# Altium PCB STM32_IMU_DataLogger.PcbDoc
Units mil, origin at the board's own origin, x right, y up, seen from the top; angles counter-clockwise.
Board outline 1675 x 1665 mil, 4 copper layers (Top Layer, Layer 2, Layer 3, Bottom Layer), stack 62.63 mil thick; 44 components, 34 nets, 195 pads, 66 vias.
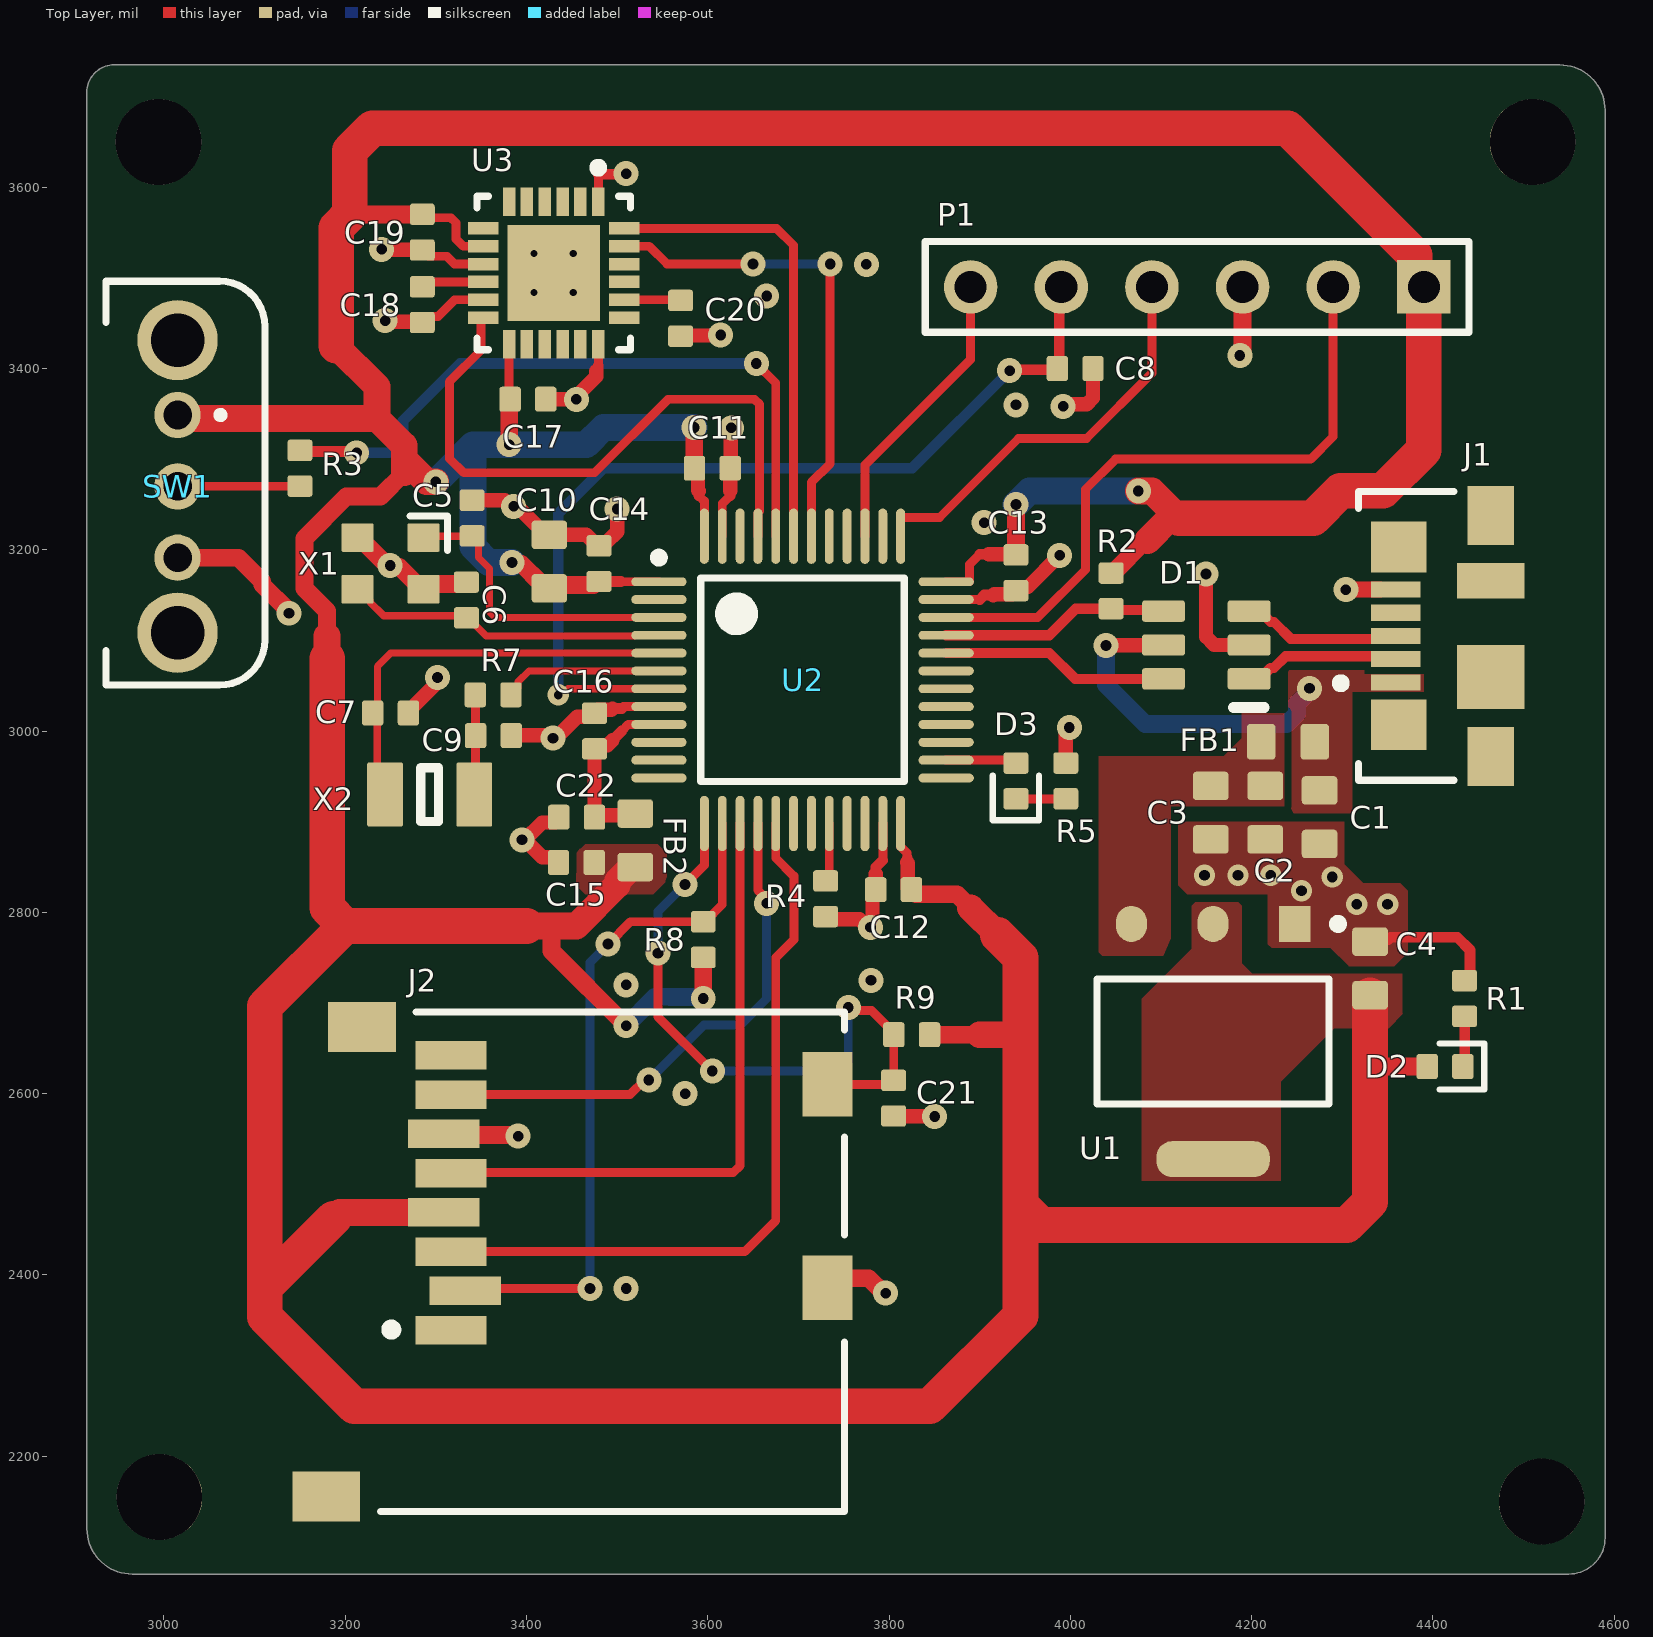
[diagram p0: Top Layer view]
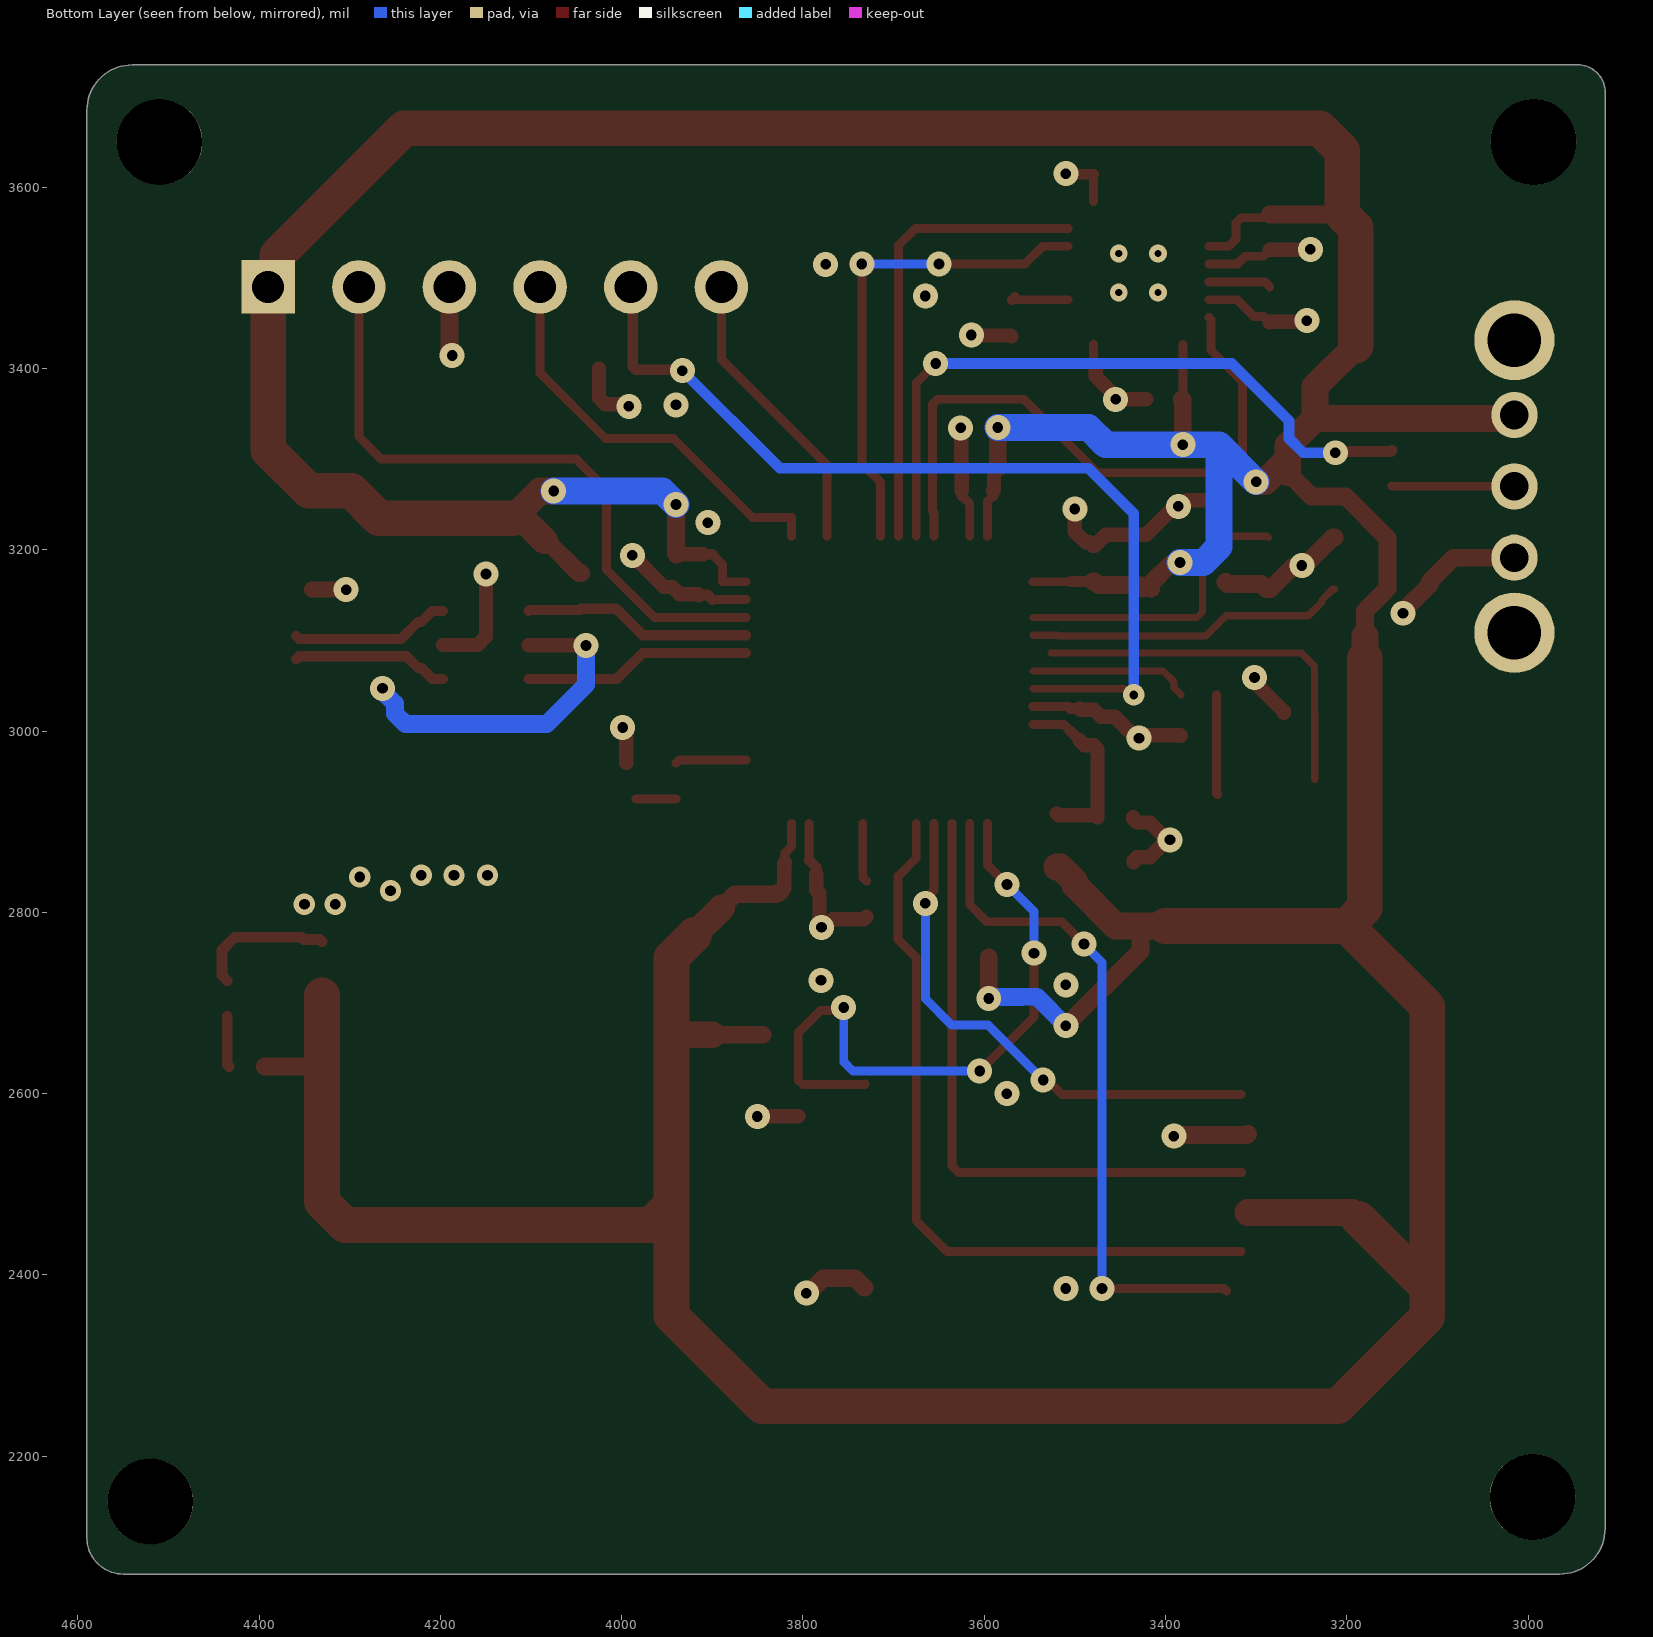
[diagram p1: Bottom Layer view, seen from below]
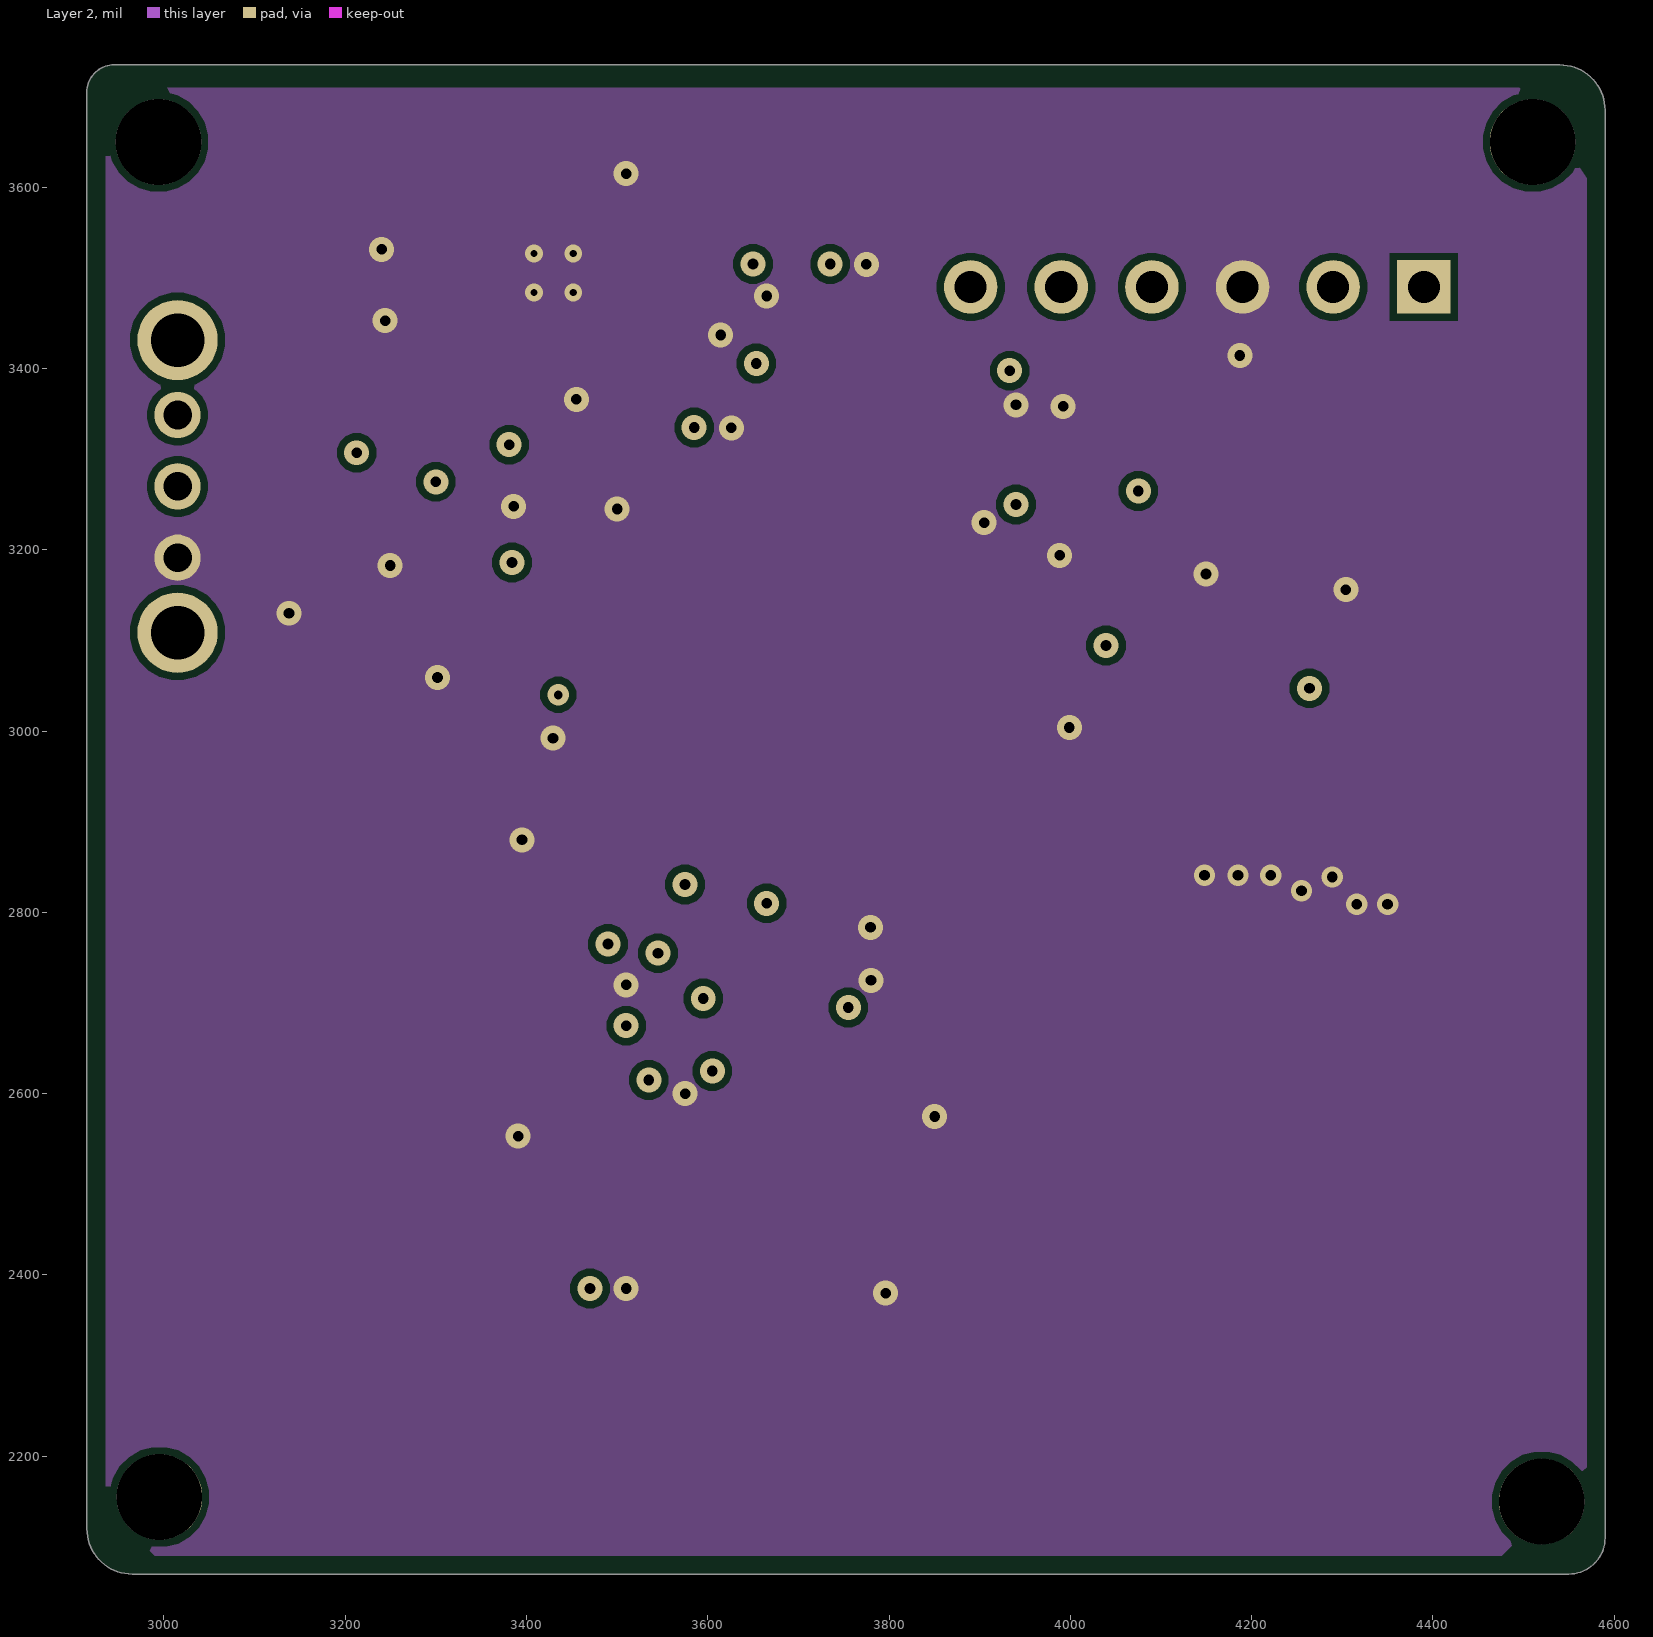
[diagram p2: Layer 2]
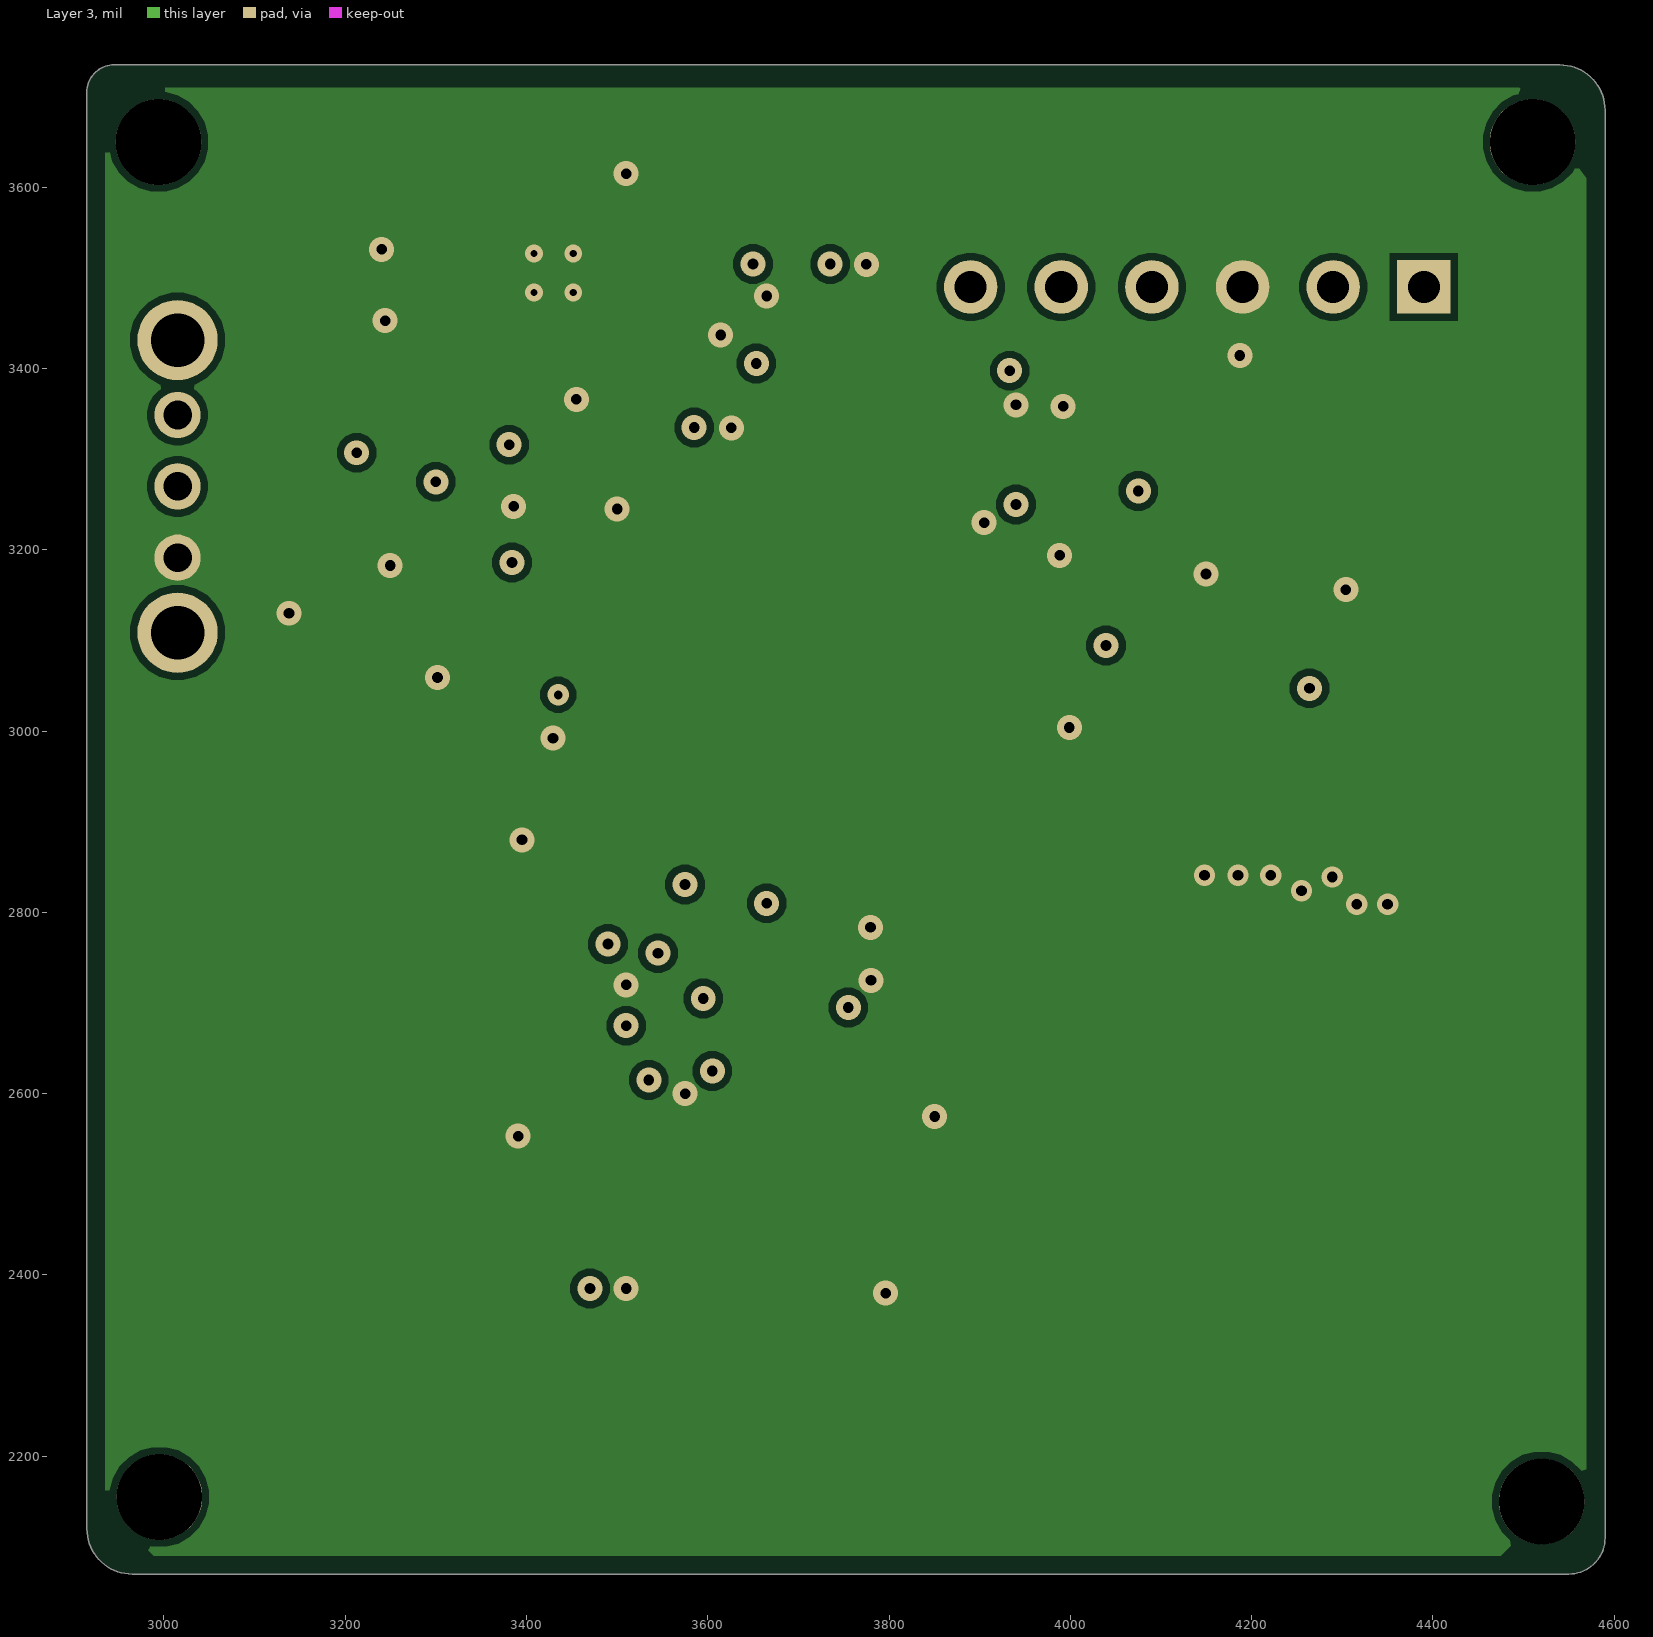
[diagram p3: Layer 3]
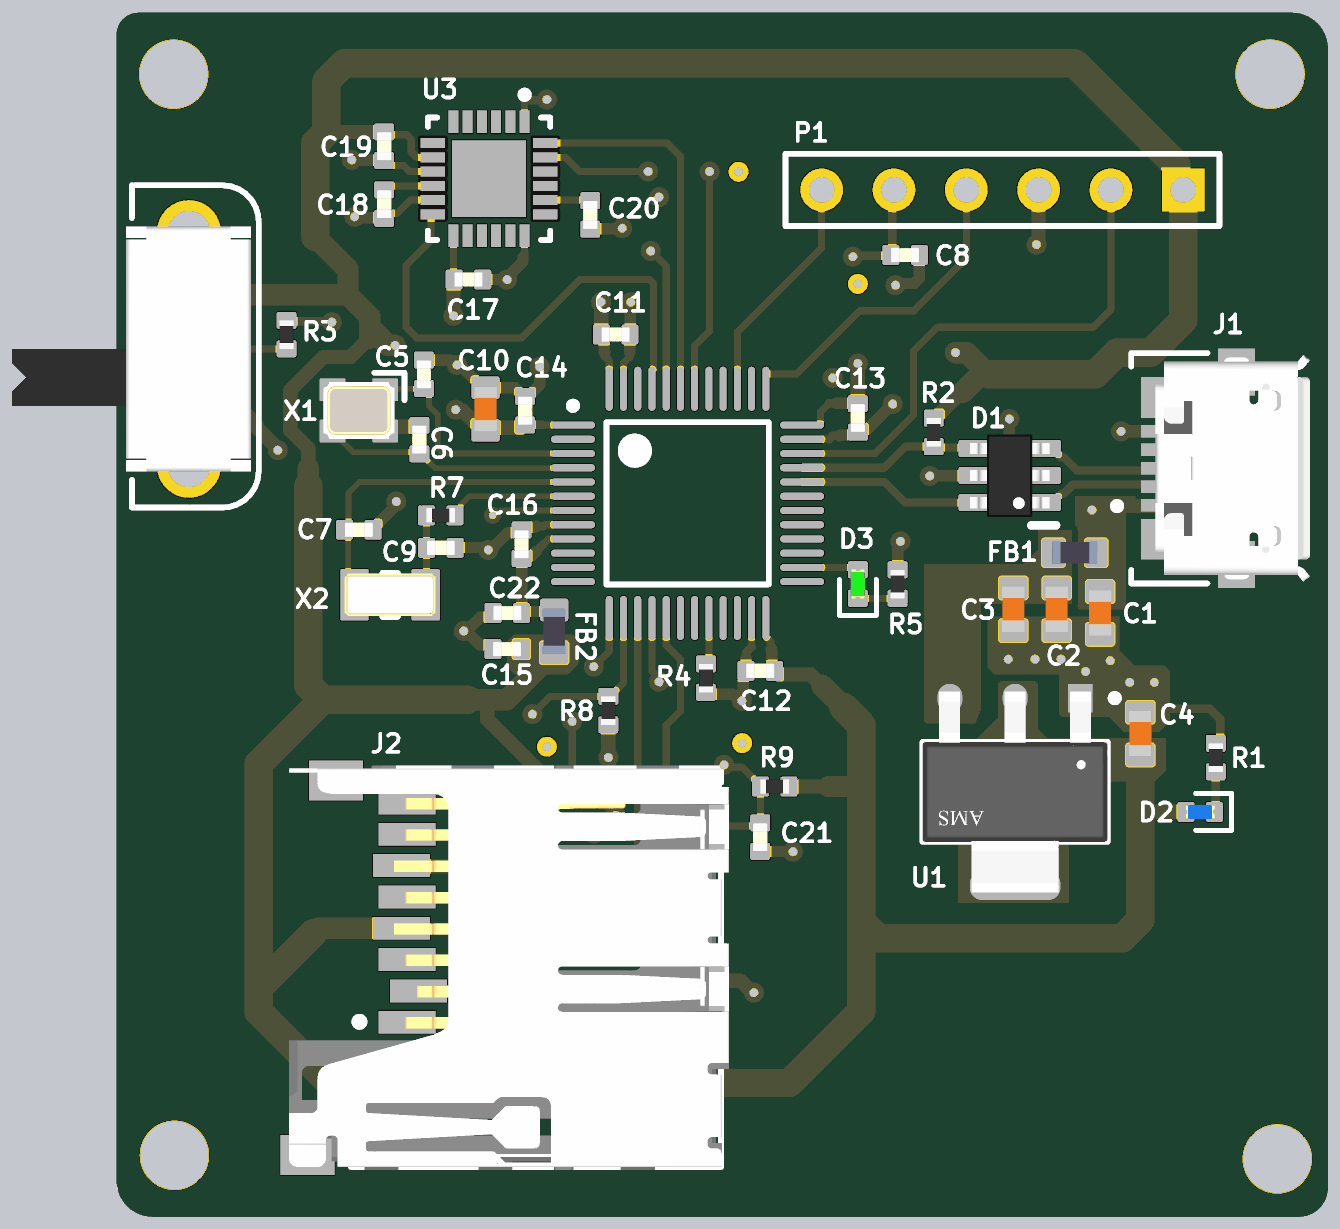
[diagram p4: 3D render of the assembled board from above, using the file's embedded part models]

## Layer stack, top to bottom
Top Solder: solder mask 1, SM-001, Dk 3.8
Top Layer: signal copper 1.378
Dielectric 1: prepreg 8.2835, PP-017, Dk 4.4
Layer 2: signal copper 0.689
Dielectric 3: core 41.9291, Core-039, Dk 4.6
Layer 3: signal copper 0.689
Dielectric 5: prepreg 8.2835, PP-017, Dk 4.4
Bottom Layer: signal copper 1.378
Bottom Solder: solder mask 1, SM-001, Dk 3.8

## Board outline
2915,2120 2915,3705 cw(c2945,3705) 2945,3735 4540,3735 cw(c4540,3685) 4590,3685 4590,2110 cw(c4550,2110) 4550,2070 2965,2070 cw(c2965,2120)

## Design rules (kind name [scope] priority, off if disabled: settings)
Clearance [All] p1: gap=7.87 ignorepadtopadclearanceinfootprint=TRUE
DiffPairsRouting [All] p1: maxlimit=10 minlimit=8 mostfreqgap=10 toplayer_maxgap=8 toplayer_prefgap=8 toplayer_minwidth=11.19 toplayer_maxwidth=11.19 toplayer_prefwidth=11.19 bottomlayer_maxgap=8 bottomlayer_prefgap=8 bottomlayer_minwidth=11.19 bottomlayer_maxwidth=11.19 bottomlayer_prefwidth=11.19 impedanceprofiledriven=TRUE impedanceprofileid={A912763B-8F11-4AA3-97E2-962D160E3E6F} impedanceprofilevalue=90.000000 maxuncoupledlength=500
MinimumSolderMaskSliver [All] p1: minsoldermaskwidth=3.94
PolygonConnect [All] p1: connectstyle=Direct reliefconductorwidth=10 reliefentries=4 polygonreliefangle="90 Angle" airgapwidth=10
RoutingVias [All] p1: holewidth=11.81 width=27.56 viastyle="Through Hole" minholewidth=9.84 minwidth=21.65 maxholewidth=15.75 maxwidth=35.43
SilkToSolderMaskClearance [IsPad] p1: minsilkscreentomaskgap=5.91 clearancetoexposedcopper=TRUE
SolderMaskExpansion [All] p1: expansion=1.5 istentingtop=FALSE
Width [All] p1: maxlimit=39.37 minlimit=7.87 preferedwidth=10 midlayer1_minwidth=10 midlayer1_maxwidth=10 midlayer2_minwidth=10 midlayer2_maxwidth=10 minimp=50.000000 maximp=50.000000 favimp=50.000000
27 further rules are at their usual default settings.

## Classes and differential pairs
differential pair USB_D: +USB_D_P -USB_D_N
differential pair USB_CONN_D: +USB_CONN_D_P -USB_CONN_D_N

## Components (designator, comment, footprint, x,y, rotation, side; value= is the part's Value field where it differs from the comment)
C1 "10n" CAP_0603 4275,2905 r90 top
C2 "100n" CAP_0603 4215,2910 r90 top
C3 "10u" CAP_0603 4155,2910 r90 top
C4 "22u" CAP_0603 4330.71,2738.19 r270 top
C5 "7p" CAP_0402 3340,3235 r270 top
C6 "7p" CAP_0402 3333.66,3144.68 r270 top
C7 "20p" CAP_0402 3250,3020 r180 top
C8 "100n" CAP_0402 4005.32,3400 r180 top
C9 "20p" CAP_0402 3363.5,2995 r180 top
C10 "4u7" CAP_0603 3425.2,3187.01 r270 top
C11 "10n" CAP_0402 3605,3290 r180 top
C12 "100n" CAP_0402 3805,2825 r0 top
C13 "100n" CAP_0402 3940,3174.68 r90 top
C14 "100n" CAP_0402 3480,3184.69 r270 top
C15 "1u" CAP_0402 3455,2855 r0 top
C16 "10n" CAP_0402 3475,3000 r270 top
C17 "100n" CAP_0402 3401.57,3366.14 r180 top
C18 "100n" CAP_0402 3285,3470.43 r90 top
C19 "10n" CAP_0402 3285,3550.43 r90 top
C20 "2n2" CAP_0402 3570,3455.43 r90 top
C21 "100n" CAP_0402 3805,2595 r90 top
C22 "1u" CAP_0402 3455.31,2905 r0 top
D1 "USBLC6-2SC6" SOT-23-6 4150,3095 r90 top
D2 "BLUE" LED_0402_BLUE 4413.39,2629.92 r0 top
D3 "GREEN" LED_0402_GREEN 3940,2945 r270 top
FB1 "120R" FB_0603 4240.16,2988.19 r180 top
FB2 "120R" FB_0603 3520,2879.53 r90 top
J1 "Micro-B USB Connector" FP-473460001-MFG 4450,3105 r90 top
J2 "MEM2061-01-188-00-A" MEM2061-01-188-00-A 3455.55,2414.45 r270 top
P1 "Header 6" HDR1X6 4390,3490 r180 top
R1 "1K" RES_0402 4435,2705 r90 top
R2 "1K5" RES_0402 4045,3154.69 r270 top
R3 "10K" RES_0402 3150,3290 r90 top
R4 "10K" RES_0402 3730,2815 r90 top
R5 "1K" RES_0402 3995,2945 r270 top
R7 "0R" RES_0402 3363.19,3040 r0 top
R8 "4K7" RES_0402 3595,2770 r270 top
R9 "4K7" RES_0402 3825,2665 r0 top
SW1 "OS102011MA1QN1" OS102011MA1QN1 3015,3270 r270 top
U1 "AMS1117-3.3" FP-AMS1117-IPC_C 4157.48,2657.48 r270 top
U2 "STM32F103C8T6" STM-LQFP48_L 3704.53,3056.54 r0 top
U3 "MPU-6050" IS-QFN-24_V 3430,3505.43 r270 top
X1 "32.768K" XTAL_2520 3250,3185 r180 top
X2 "8MHz" XTAL_3215-2 3293.19,2930 r0 top

## Footprints (in the part's own frame and the unit in brackets; to place one, negate y for a bottom-side part, rotate by r counter-clockwise, add the part's x,y. Pads: shape width x height; smd on the part's side, far side on the other; paste and mask are expansions set on the pad)
CAP_0402 [mm]
  rrect25% 0.6x0.7 smd: 1(-0.5,0) 2(0.5,0)
  body extent -0.5,-0.26 0.5,0.27, height 0.37
CAP_0603 [mm]
  rrect25% 0.8x1 smd: 1(-0.75,0) 2(0.75,0)
  body extent -0.8,-0.4 0.8,0.4, height 0.51
FB_0603 [mm]
  rrect25% 0.8x1 smd: 1(-0.75,0) 2(0.75,0)
  body extent -0.8,-0.4 0.8,0.4, height 0.81
FP-473460001-MFG [mm]
  rect 0.45x1.38 smd paste+0 mask+0: 1(-1.3,2.31) 2(-0.65,2.31) 3(0,2.31) 4(0.65,2.31) 5(1.3,2.31)
  rect 1.425x1.55 smd paste+0 mask+0: 6(-2.488,2.225) 7(2.488,2.225)
  rect 1.65x1.3 smd paste+0 mask+0: 8(-3.375,-0.35) 11(3.375,-0.35)
  rect 1.8x1.9 smd paste+0 mask+0: 9(-1.15,-0.35)
  rect 1x1.9 smd paste+0 mask+0: 10(1.55,-0.35)
  silkscreen extent -4.05,0.67 4.05,3.97, body extent -4.3,-2.48 4.3,3.45, height 0.25
FP-AMS1117-IPC_C [mm]
  rect 1.004x0.872 smd paste+0 mask+0: 1(-3.295,2.29)
  rrect100% 1.004x0.872 smd paste+0 mask+0: 2(-3.295,0) 3(-3.295,-2.29)
  rrect87% 1.004x3.182 smd paste+0 mask+0: 4(3.295,0)
  silkscreen extent -3.42,-3.25 1.75,3.63, body extent -3.9,-3.35 3.9,3.35, height 0.25
HDR1X6 [mm] "Connector; Header; 6 Position"
  rect 1.5x1.5 hole 0.9: 1(0,0)
  round 1.5 hole 0.9: 2(2.54,0) 3(5.08,0) 4(7.62,0) 5(10.16,0) 6(12.7,0)
  silkscreen extent -1.27,-1.27 13.97,1.27
IS-QFN-24_V [mm] "QFN, 24-Leads, Body 4x4mm, Pitch 0.5mm, Thermal Pad 2.7x2.6mm"
  rect 0.8x0.35 smd: 1(-2,1.25) 2(-2,0.75) 3(-2,0.25) 4(-2,-0.25) 5(-2,-0.75) 6(-2,-1.25) 13(2,-1.25) 14(2,-0.75) 15(2,-0.25) 16(2,0.25) 17(2,0.75) 18(2,1.25)
  rect 0.35x0.85 smd mask+0.102: 7(-1.25,-1.975) 8(-0.75,-1.975) 9(-0.25,-1.975) 10(0.25,-1.975) 11(0.75,-1.975) 12(1.25,-1.975) 19(1.25,1.975) 20(0.75,1.975) 21(0.25,1.975) 22(-0.25,1.975) 23(-0.75,1.975) 24(-1.25,1.975)
  rect 2.7x2.6 smd: 25(0,0)
  silkscreen extent -3.07,-2.15 2.15,2.15, body extent -2,-2 2,2, height 0.95
LED_0402_BLUE [mm]
  rrect25% 0.6x0.7 smd: A(-0.5,0) K(0.5,0)
  silkscreen extent -0.15,-0.65 1.1,0.65, body extent -0.51,-0.25 0.51,0.25, height 0.45
LED_0402_GREEN [mm]
  rrect25% 0.6x0.7 smd: A(-0.5,0) K(0.5,0)
  silkscreen extent -0.15,-0.65 1.1,0.65, body extent -0.51,-0.25 0.51,0.25, height 0.45
MEM2061-01-188-00-A [mm]
  rect 0.8x2 smd: 1(1.915,-3.525) 2(0.815,-3.125) 3(-0.285,-3.525) 4(-1.385,-3.725) 5(-2.485,-3.525) 6(-3.585,-3.725) 7(-4.685,-3.525) 8(-5.785,-3.525)
  rect 1.8x1.4 smd: CD1(0.725,7.025) CD2(-4.975,7.025)
  rect 1.4x1.9 smd: SH(-6.575,-6.025) SH(6.575,-7.025)
  silkscreen extent -7,-5.5 7,7.5, body extent -7.1,-7.67 7.1,7.78, height 1.94
OS102011MA1QN1 [mm]
  round 1.3 hole 0.8: 1(-2,0) 2(0,0) 3(2,0)
  round 2.25 hole 1.5: MH(-4.1,0) MH(4.1,0)
  silkscreen extent -5.75,-2 5.57,2.45, body extent -4.3,-6.22 4.3,2.18, height 4.59
RES_0402 [mm]
  rrect25% 0.6x0.7 smd: 1(-0.5,0) 2(0.5,0)
  body extent -0.5,-0.25 0.5,0.25, height 0.3
SOT-23-6 [mm]
  rrect25% 0.6x1.2 smd: 1(-0.95,-1.2) 2(0,-1.2) 3(0.95,-1.2) 4(0.95,1.2) 5(0,1.2) 6(-0.95,1.2)
  silkscreen extent -1.75,-1.63 -1.75,-0.76, body extent -1.45,-1.4 1.45,1.4, height 1.45
STM-LQFP48_L [mm] "QFP, 48-Leads, Body 7x7mm, Pitch 0.5mm, IPC High Density"
  oval 1.55x0.25 smd: 1(-4.025,2.75) 2(-4.025,2.25) 3(-4.025,1.75) 4(-4.025,1.25) 5(-4.025,0.75) 6(-4.025,0.25) 7(-4.025,-0.25) 8(-4.025,-0.75) 9(-4.025,-1.25) 10(-4.025,-1.75) 11(-4.025,-2.25) 12(-4.025,-2.75) 25(4.025,-2.75) 26(4.025,-2.25) 27(4.025,-1.75) 28(4.025,-1.25) 29(4.025,-0.75) 30(4.025,-0.25) 31(4.025,0.25) 32(4.025,0.75) 33(4.025,1.25) 34(4.025,1.75) 35(4.025,2.25) 36(4.025,2.75)
  oval 0.25x1.55 smd: 13(-2.75,-4.025) 14(-2.25,-4.025) 15(-1.75,-4.025) 16(-1.25,-4.025) 17(-0.75,-4.025) 18(-0.25,-4.025) 19(0.25,-4.025) 20(0.75,-4.025) 21(1.25,-4.025) 22(1.75,-4.025) 23(2.25,-4.025) 24(2.75,-4.025) 37(2.75,4.025) 38(2.25,4.025) 39(1.75,4.025) 40(1.25,4.025) 41(0.75,4.025) 42(0.25,4.025) 43(-0.25,4.025) 44(-0.75,4.025) 45(-1.25,4.025) 46(-1.75,4.025) 47(-2.25,4.025) 48(-2.75,4.025)
  silkscreen extent -4.15,-2.85 2.85,3.55, body extent -3.5,-3.5 3.5,3.5, height 1.6
XTAL_2520 [mm]
  rrect10% 0.9x0.8 smd mask+0: 1(-0.925,-0.725) 2(0.925,-0.725) 3(0.925,0.725) 4(-0.925,0.725)
  silkscreen extent -1.6,-1.33 -0.54,-0.36, body extent -1.25,-1 1.25,1, height 0.8
XTAL_3215-2 [mm]
  rrect10% 1x1.8 smd: 1(-1.25,0) 2(1.25,0)
  silkscreen extent -0.25,-0.75 0.25,0.75, body extent -1.6,-0.75 1.6,0.75, height 0.91

## Part data
C1 C2 C3 C4 C10: library part CAP_0603, "Capacitor SMD 0603"
C5 C6 C7 C8 C9 C11 C12 C13 C14 C15 C16 C17 C18 C19 C20 C21 C22: library part CAP_0402, "Capacitor SMD 0402"
D1: "Low-Capacitance ESD Protection USB", Manufacturer=STMicroelectronics, Distributor Link=https://www.mouser.de/ProductDetail/STMicroelectronics/USBLC6-2SC6?qs=po45yt2pPpu%2FhNIlwQdTlg%3D%3D, Manufacturer Part Number=USBLC6-2SC6
D2: library part LED_0402_BLUE, "LED 0402 BLUE SMD"
D3: library part LED_0402_GREEN, "LED 0402 GREEN SMD"
FB1 FB2: library part FB_0603, "Ferrite Bead SMD 0603"
J1: library part CMP-2000-05246-2, "CONN RCPT USB2.0 MICRO B SMD R/A", Current Rating=1.8A, Manufacturer=Molex, Manufacturer Part Number=473460001, Package=0, Temperature="-30°C to +85°C", Temperature Range High=+85°C, Temperature Range Low=-30°C, Voltage Rating=30V, Automotive=No, Category=Conn, ComponentLink2Description=Datasheet, ComponentLink2URL=https://www.molex.com/webdocs/datasheets/pdf/en-us/0473460001_IO_CONNECTORS.pdf, Conn Orientation="Right Angle", Contact Material=Gold,Nickel, Device Class L1=Connectors, Device Class L2="USB Connectors", Device Class L3=unset, Digikey Description="CONN RCPT USB2.0 MICRO B SMD R/A", Footprint Url=https://www.molex.com/pdm_docs/sd/473460001_sd.pdf, Height=2.945mm, Is Female=yes, Lead Free=Yes, Number Of Contacts=5, Octopart=https://octopart.com/47346-0001-molex-7164928, Pitch=0.65mm, RoHS=TRUE, Shielding=true, Usb Standard="USB 2.0"
J2: "Micro SD Card Holder Push-Push SMD", Manufacturer=GCT, Manufacturer Part Number=MEM2061-01-188-00-A
P1: "Header, 6-Pin", LatestRevisionDate=17-Jul-2002, LatestRevisionNote="Re-released for DXP Platform.", Publisher="Altium Limited"
R1 R2 R3 R4 R5 R7 R8 R9: library part RES_0402, "Resistor SMD 0402"
SW1: "Slide Switch SPDT Horizontal THT", Manufacturer=C&K, Manufacturer Part Number=OS102011MA1QN1
U1: library part CMP-209535-000001-1, "LDO Voltage Regulators 1A, 3.3V", Dropout Voltage=1.1V, Manufacturer="Advanced Monolithic Systems", Max Junction Temp=+125°C, Max Power Dissipation=1.2W, Max Supply Voltage=15V, Nominal Supply Current=5mA, Output Current=1A, Output Voltage=3.3V, Package=AMS1117, Temperature="-40°C to +125°C", Temperature Range Low=-40°C, Automotive=No, Category=IC, ComponentLink2Description=Datasheet, ComponentLink2URL=http://www.advanced-monolithic.com/pdf/ds1117.pdf, Device Class L1="Integrated Circuits (ICs)", Device Class L2="Power Management ICs", Device Class L3="Voltage Regulators - Linear", Height=1.8mm, Ipc Land Pattern Name=SOT229P700X180-4, Lead Free=Yes, Manufacturer Part Number=AMS1117-3.3, Number Of Outputs=1, Octopart=https://octopart.com/ams1117-3.3-advanced+monolithic+systems-25899300, Output Type=Fixed, RoHS=TRUE, Standoff Height=0.64mm, Temperature Range High=+125°C
U2: library part CMP-0237-00215-3, "ARM Cortex-M3 32-bit MCU, 64 KB Flash, 20 KB Internal RAM, 37 I/Os, 48-pin LQFP, -40 to 85 degC, Tray", I/Os (High Current)=37, Operating Frequency(F) (Processor speed) (MHz)=72, Supply Voltage(Vcc) min (V)=2, A/D Converter="2x12-bit (10 Channel)", ComponentLink1Description="Manufacturer URL", ComponentLink1URL=http://www.st.com/web/en/home.html, ComponentLink2Description=Datasheet, ComponentLink2URL=http://www.st.com/st-web-ui/static/active/en/resource/technical/document/datasheet/CD00161566.pdf, ComponentLink3Description="Package Specification", ComponentLink3URL=http://www.st.com/st-web-ui/static/active/en/resource/technical/document/datasheet/DM00058181.pdf, Core="ARM Cortex-M3", DatasheetVersion="Rev. 16", FLASH Size (Prog) (kB)=64, Internal RAM Size (kB)=20, Mounting Technology="Surface Mount", PackageDescription="48-Pin Low Profile Quad Flat Package, 7 x 7 mm Body, 0.5 mm Pitch", PackageReference=LQFP48, PackageVersion="Rev. 6, 06/2013", Packing=Tray, PartNumber=STM32F103C8T6
U3: library part CMP-1753-00002-2, "3-Axis Gyroscope, Accelerometer and a Digital Motion Processor(TM) (DMP), 2.375 to 3.46 V, -40 to 85 degC, 24-Pin QFN, RoHS, Tape and Reel", Manufacturer=InvenSense, Standard Package=5,000, Category=Sensors,Transducers, Datasheet URL=http://datasheet.octopart.com/MPU-6050-InvenSense-datasheet-14421344.pdf, Datasheet Version="Rev. 3.3, 05/2012", Dynamic Catalog=MPU-6000™Series, Family=Multifunction, Featured Product=MPU-60506-Axis,IntegratedI²CSolution, Manufacturer URL=http://www.invensense.com/, Online Catalog=MPU-6000™Series, Other Names="1428-1007-2 / MPU6050", Output Type=Digital, Sensor Type=MotionTracking, Unit PriceUSD=Digital
X1: library part XTAL_2520, "Crystal SMD 2520"
X2: library part XTAL_3215, "Crystal SMD 3215"

## Free pads (board coordinates)
  round 94.49 hole 94.49: MH(2994,3650) MH(2995,2155) MH(4510,3650) MH(4520,2150)

## Via types
v1: diameter 27.56, hole 11.81, Top Layer to Bottom Layer, tented both sides, 49 vias
v2: diameter 23.62, hole 11.81, Top Layer to Bottom Layer, tented both sides, 7 vias
v3: diameter 27.56, hole 11.81, Top Layer to Bottom Layer, 5 vias
v4: diameter 19.68, hole 7.87, Top Layer to Bottom Layer, tented both sides, 4 vias
v5: diameter 23.62, hole 9.84, Top Layer to Bottom Layer, tented both sides, 1 vias

## Nets (pads, with @x,y where several pads share a name; then routed paths per layer and width w, separated by ;. In a path a pad name is that pad's centre, name@x,y a point inside that pad or via, vN(x,y) a via of type N, cw(c..) or ccw(c..) an arc to the next point about the centre after c; other vN are vias at no path point)
3V3: C4.2 C10.2 C11.2 C12.2 C13.2 C14.2 C15.2 C17.2 C19.2 D2.A FB2.1 J2.4 P1.1 R2.1 R8.2 R9.2 SW1.1 U1.2 U1.4 U2.1 U2.24 U2.36 U2.48 U3.8 U3.13 | length 8187.7
  Top Layer w9.84: C19.2 3288.8,3566.32 3316.66,3566.32 3322.42,3560.56 3322.42,3542.75 3330.21,3534.96 U3.8 ; C17.2@3380.79,3369.65 U3.13 ; 3504,3165 3504.2,3164.8 U2.1 ; 3590,3260 3596.26,3253.74 U2.48 ; U2.24 3812.8,2872.48 3820,2865.28 3820,2860 ; U2.36 3888.58,3164.8 3888.58,3183.58 3900,3195
  Top Layer w11.81: C14.2 3504,3165 ; 3590,3260 3590,3265 ; 3820,2855 3820,2860 ; 3900,3195 3910,3195
  Top Layer w15.75: C11.2 3589.25,3286.06 3589.25,3265.75 3590,3265 ; 3820,2855 3820.75,2854.25 3820.75,2826.97 C12.2@3824.69,2823.03 ; 3910,3195 C13.2@3939.37,3195
  Top Layer w19.68: 3180,3105 3180,3132.44 3155,3157.44 3155,3212.56 3201.22,3258.78 3238.78,3258.78 3265,3285 ; 3205.12,3570.12 C19.2 ; v1(3380.94,3315.94) 3380.94,3365.2 C17.2 ; v1(3383.94,3186.07) 3385.45,3184.57 3394.17,3184.57 3416,3162.74 C10.2@3416,3157 ; C10.2 3428.72,3161 3474.03,3161 3478.03,3165 C14.2 ; 3427.5,2785 3427.5,2757.5 v1(3510,2675) ; v1(3585,3335) 3585.16,3334.84 3585.16,3290.16 C11.2 ; v1(3595,2705) R8.2 ; C12.2@3824.69,2823.03 3826.65,2821.06 3828.62,2821.06 3829.69,2820 3875,2820 3890,2805 ; R9.2 3900,2665 ; C13.2@3939.37,3195 3940,3195.63 v1(3940,3250) ; R2.1 4046.97,3174.37 4082.6,3210 4085,3210 ; 4330.71,2630 4393.62,2630 D2.A
  Top Layer w29.53: SW1.1 3018.74,3345 3235,3345 ; 3180,3080 3180,3105 ; 3187,2462 3193.98,2468.98 J2.4 ; 3190,3425 3235,3380 3235,3345 ; 3265,3285 3265,3300 ; v1(3300,3275) 3290,3275 3272.5,3292.5 3265,3300 ; 3400,2785 3427.5,2785 3455,2785 3500,2830 3500,2833.94 3516.06,2850 FB2.1 ; 3890,2805 3920,2775 ; 3900,2665 3945,2665 ; v1(4075,3265) 4090,3265 4120,3235 4110,3235 4085,3210 ; 3235,3345 3265,3315 3265,3300
  Top Layer w39.37: 3180,3080 3180,2805 3200,2785 ; 3187,2462 3111.31,2386.31 ; 3190,3425 3190,3555 3205.12,3570.12 3205.12,3640.12 3230,3665 4240,3665 4380.16,3524.84 4380.16,3499.84 P1.1 4390,3310 4345,3265 4298.06,3265 4268.06,3235 4120,3235 ; 3400,2785 3200,2785 ; 3920,2775 3945,2750 3945,2665 3945,2478.06 ; C4.2 4330.71,2630 4330.71,2480.71 4305,2455 3968.06,2455 3945,2478.06 ; 3111.31,2386.31 3111.31,2696.31 3200,2785 ; 3111.31,2386.31 3111.31,2353.69 3210,2255 3845,2255 3945,2355 3945,2478.06
  Bottom Layer w19.68: v1(3510,2675) 3541.85,2706.85 3558.16,2706.85 3558.5,2706.51 3593.49,2706.51 v1(3595,2705)
  Bottom Layer w29.53: v1(3300,3275) 3340.94,3315.94 ; v1(3383.94,3186.07) 3358.24,3186.07 3340.94,3203.37 3340.94,3315.94 ; v1(3585,3335) 3485,3335 3465.94,3315.94 v1(3380.94,3315.94) 3340.94,3315.94 ; v1(3940,3250) 3955,3265 v1(4075,3265)
3V3_LED_K: D2.K R1.1 | length 56.2
  Top Layer w11.81: D2.K 4435.04,2631.89 R1.1
3V3A: C16.2 C22.2 FB2.2 U2.9 | length 204.2
  Top Layer w9.84: 3505,3000 3512.32,3007.32 U2.9
  Top Layer w11.81: 3495,2990 3505,3000
  Top Layer w15.75: 3495,2990 3489.25,2984.25 3478.94,2984.25 C16.2 C22.2 3477.03,2907.03 3517.97,2907.03 FB2.2
+5V: C2.2 C3.2 FB1.2 U1.3
BOOT1: R4.2 U2.20 | length 65.1
  Top Layer w9.84: R4.2 3734.06,2838.74 U2.20
CD: C21.2 J2.CD2 R9.1 U2.13 | length 716.2
  Top Layer w9.84: v1(3545,2755) 3545,2685 v1(3605,2625) ; v1(3574.8,2830.71) 3596.26,2852.17 U2.13 ; J2.CD2@3731.57,2610.87 J2.CD2 C21.2@3800,2610.31 ; v1(3755,2695) 3758.39,2691.61 3780.67,2691.61 3805.16,2667.13 3805.16,2614.84 C21.2
  Bottom Layer w9.84: v1(3545,2755) 3545,2800.91 v1(3574.8,2830.71) ; v1(3605,2625) 3745,2625 3755,2635 v1(3755,2695)
CPOUT: C20.2 U3.20 | length 67.3
  Top Layer w9.84: U3.20 C20.2@3569.21,3475.91 ; C20.2@3565.87,3479.25 C20.2
CS: J2.2 R8.1 U2.14 | length 760.3
  Top Layer w9.84: J2.2 3335.16,2385 v1(3470,2385) ; v1(3490,2765) 3514.68,2789.68 3596.97,2789.68 3615.94,2808.66 U2.14
  Bottom Layer w9.84: v1(3470,2385) 3470,2744.63 3490,2764.63 v1(3490,2765)
GND: C1.1 C2.1 C3.1 C4.1 C5.1 C6.1 C7.1 C8.1 C9.1 C10.1 C11.1 C12.1 C13.1 C14.1 C15.1 C16.1 C17.1 C18.1 C19.1 C20.1 C21.1 C22.1 D1.2 J1.5 J2.6 J2.CD1 P1.3 R1.2 R4.1 R5.1 SW1.3 U1.1 U2.8 U2.23 U2.35 U2.47 U3.1 U3.9 U3.11 U3.18 U3.25 X1.2 X1.4 | length 2432.7
  Top Layer w9.84: C18.1 3291.89,3457.64 3302.48,3457.64 3320.75,3475.91 U3.11 ; C19.1 3291.89,3523.86 3312.17,3523.86 3320.75,3515.28 U3.9 ; v4(3451.65,3527.09) U3.25@3451.65,3529.06 ; 3479,3403 3479.21,3403.21 U3.18 ; U3.1 3479.21,3614.21 ; 3505,3025 3507.01,3027.01 U2.8 ; U2.47 3615.94,3250.94 3624.68,3259.68 ; 3793.11,2857.48 U2.23 ; U2.35 3899.88,3145.12 3900,3145
  Top Layer w11.81: 3477,3397 3479,3399 3479,3403 ; 3479.21,3614.21 3509.21,3614.21 v1(3510,3615) ; 3495,3025 3505,3025 ; 3624.68,3259.68 3624.68,3265.32 ; 3785.32,2842.34 3785.32,2849.68 3793.11,2857.48 ; 3900,3145 3905.11,3150.11 3914.89,3150.11 3915,3150 ; C4.1 4333.17,2770.18 4350.89,2770.18 4353.35,2772.64 4426.8,2772.64 4440.94,2758.49 4440.94,2730.63 R1.2
  Top Layer w15.75: v1(3240.16,3531.5) 3240.53,3531.12 3284.63,3531.12 C19.1 ; v1(3244.09,3452.76) 3245.1,3451.75 3284,3451.75 C18.1 ; C7.1 3269.68,3021.97 3299.51,3051.8 3299.51,3056.8 v1(3301.77,3059.06) ; C5.1 3375.98,3254.68 3382.63,3248.03 v1(3385.83,3248.03) 3388.09,3245.77 3392.02,3245.77 3421.26,3216.54 C10.1 3465.87,3216.54 3478.03,3204.37 C14.1 3483.94,3208.31 3488.31,3208.31 3500,3220 v1(3500,3245) ; C9.1 3383.72,2995.53 v1@3420.73,2995.53 ; v1(3395,2880) v1@3398.2,2880 ; C17.1 C17.1 3454.93,3366.07 v1(3455,3366) 3455,3369.2 3477,3391.2 3477,3397 ; v1(3429.13,2992.13) 3432.33,2992.13 3455.95,3015.75 3471.06,3015.75 C16.1 3478.94,3023.62 3493.62,3023.62 3495,3025 ; C15.1 3435.32,2856.97 3431.38,2860.91 3417.29,2860.91 v1@3398.2,2880 ; C22.1 3435.63,2903.03 3431.69,2899.09 3417.29,2899.09 v1@3398.2,2880 ; C20.1 3570.63,3436.38 3613.54,3436.38 v1(3614.17,3437.01) ; 3624.68,3265.32 C11.1 3625.33,3290.65 3625.33,3334 v1(3625.98,3334.65) ; R4.1 3732.92,2792.39 3767.4,2792.39 3776.33,2783.46 v1(3779.53,2783.46) 3781.79,2785.72 3781.79,2821.47 C12.1 3785.32,2842.34 ; C21.1 3805.26,2575.06 3850.14,2575.06 v1(3850.39,2574.8) ; 3915,3150 3916.06,3151.06 3936.06,3151.06 C13.1 3943.94,3158.94 3953.23,3158.94 v1(3988.19,3193.9) ; v1(3992.13,3358.27) 3994.39,3360.53 4018.01,3360.53 4025,3367.52 C8.1 ; R5.1 3995,2996.92 3998.94,3000.86 v1(3998.94,3004.06) ; v1(4149.61,3173.23) 4149.61,3104.23 4158.83,3095 D1.2
  Top Layer w17.72: v1(4304,3156) 4304.18,3156.18 J1.5@4341.73,3156.18
  Top Layer w19.68: SW1.3 3082.21,3191.26 3108.54,3164.93 3108.54,3161.49 3137.89,3132.14 v1(3137.89,3130.01) ; X1.2 3215.55,3213.54 3244.81,3184.28 3248.02,3184.28 v1(3249.52,3182.78) ; v1@3248.04,3179.6 3249.71,3181.27 3259.64,3181.27 3284.45,3156.46 X1.4 3288.39,3156.46 3294.33,3162.4 3331.69,3162.4 C6.1 ; J2.6 3310.12,2554.37 3389.53,2554.37 v1(3390.75,2553.15) ; J2.CD1 3742.59,2396.37 3777.68,2396.37 3794.13,2379.92 v1(3796.26,2379.92) ; v1(4187.01,3414.37) 4187.01,3416.5 4190,3419.49 P1.3
  other v1: 3575,2600 3905,3230 3665,3480
  other v2: 4315.94,2809.06 4350,2809 4255,2824 4289,2839 4148,2841 4185,2841 4221,2841
  other v3: 3510,2385 3510,2720 3780,2725 3940,3360 3775,3515
  other v4: 3408.35,3483.78 3451.65,3483.78 3408.35,3527.09
HS_XTAL_IN: C9.2 R7.1 X2.2 | length 110.5
  Top Layer w9.84: X2.2 3343.5,2931.1 R7.1
HSE_OSC_IN: C7.2 U2.5 X2.1 | length 421.7
  Top Layer w7.87: X2.1@3235.32,2946.54 C7.2@3235.32,3020 ; C7.2@3235.63,3020 3235.63,3071.46 3250.24,3086.06 U2.5@3526.38,3086.06
HSE_OSC_OUT: R7.2 U2.6 | length 177.9
  Top Layer w7.87: R7.2 3390.75,3047.87 3390.75,3054.39 3402.74,3066.38 U2.6
IMU_INT: U2.45 U3.12 | length 702
  Top Layer w9.84: U3.12 3351.97,3456.22 3350,3454.25 3350,3420.43 3315,3385.43 3315,3300.77 3330.77,3285 3475,3285 3556.14,3366.14 3651.52,3366.14 3657.28,3360.38 3657.28,3242.56 3655.32,3240.59 U2.45
IMU_SCL: U2.42 U3.23 | length 544.3
  Top Layer w9.84: U3.23 3535.47,3534.96 3555,3515.43 v1(3650,3515.43) ; U2.42 3714.37,3274.37 3735,3295 v1(3735,3515.43)
  Bottom Layer w9.84: v1(3650,3515.43) v1(3735,3515.43)
IMU_SDA: U2.43 U3.24 | length 515.5
  Top Layer w9.84: U3.24 3675.79,3554.65 3694.68,3535.75 U2.43
LSE_OSC_IN: C5.2 U2.3 X1.1 | length 334.7
  Top Layer w7.87: X1.1 3287.87,3215 3339.34,3215 3346.9,3207.44 3346.9,3191.69 3359.25,3179.34 3359.25,3131.38 3365.2,3125.43 U2.3
LSE_OSC_OUT: C6.2 U2.4 X1.3 | length 355.3
  Top Layer w7.87: X1.3 3215.55,3156.46 3227.36,3144.65 3227.36,3142.24 3242.41,3127.2 3320.32,3127.2 3333.12,3127.2 C6.2@3335,3125.31 ; C6.2@3335,3124.88 3335.75,3124.88 3355.6,3105.03 3519.22,3105.03 3519.94,3105.75 U2.4
MCU_BOOT0: R3.2 U2.44 | length 756.3
  Top Layer w9.84: v1(3653.54,3405.51) 3675,3384.06 U2.44
  Top Layer w11.81: R3.2 3151.3,3308.39 3211.3,3308.39 v1(3212.6,3307.09)
  Bottom Layer w11.81: v1(3212.6,3307.09) 3248.03,3307.09 3263.78,3322.83 3263.78,3342.52 3326.77,3405.51 v1(3653.54,3405.51)
MCU_LED_A: D3.A U2.26 | length 78.4
  Top Layer w9.84: U2.26 3936.73,2967.95 D3.A
MCU_LED_K: D3.K R5.2 | length 44.3
  Top Layer w9.84: D3.K 3940.16,2925.16 R5.2@3984.25,2925.16
MCU_NRST: C8.2 P1.5 U2.7 | length 1022.5
  Top Layer w7.87: v5(3435,3040) 3439.26,3040 3445.95,3046.69 U2.7
  Top Layer w11.81: v1(3933.07,3397.64) 3934.25,3398.82 3984.45,3398.82 C8.2 3987.81,3402.18 3987.81,3487.81 P1.5
  Bottom Layer w11.81: v5(3435,3040) 3435,3240 3485,3290 3825.43,3290 v1(3933.07,3397.64)
REGOUT: C18.2 U3.10 | length 69.5
  Top Layer w9.84: C18.2 3290.47,3495.59 U3.10
SPI_MISO: J2.7 U2.16 | length 589.3
  Top Layer w9.84: J2.7 3514.1,2598.9 3530.21,2615 v1(3535,2615) ; U2.16 3655.32,2824.48 3665,2814.79 v1(3665,2810)
  Bottom Layer w9.84: v1(3535,2615) 3595.69,2675.69 3635.69,2675.69 3665,2705 v1(3665,2810)
SPI_MOSI: J2.3 U2.17 | length 827.1
  Top Layer w9.84: J2.3 3640.67,2425.67 3675,2460 3675,2750 3695,2770 3695,2840 3675,2860 U2.17
SPI_SCLK: J2.5 U2.15 | length 700.1
  Top Layer w9.84: J2.5@3316.22,2512.83 3627.83,2512.83 3635.63,2520.63 U2.15
SW_BOOT0: R3.1 SW1.2 | length 135.1
  Top Layer w9.84: SW1.2 3015.16,3270.16 3149.84,3270.16 R3.1
SWCLK: P1.4 U2.37 | length 458.9
  Top Layer w9.84: U2.37 3812.8,3235.67 3855.67,3235.67 3942.83,3322.83 4017.83,3322.83 4090,3395 P1.4
SWDIO: P1.2 U2.34 | length 726.6
  Top Layer w9.84: U2.34 3964.02,3125.43 4016.73,3178.15 4016.73,3266.73 4050,3300 4265,3300 4290,3325 P1.2
SWO: P1.6 U2.39 | length 323.3
  Top Layer w9.84: U2.39 3773.43,3293.43 3890,3410 P1.6
USB_CONN_D_N: D1.1 J1.2 | length 173.5
  Top Layer w11.19: D1.1 4209.06,3057.6 4221.18,3069.72 4224.71,3069.72 4237.6,3082.61 4355.85,3082.61 J1.2
USB_CONN_D_P: D1.3 J1.3 | length 175.8
  Top Layer w11.19: D1.3 4209.06,3132.4 4221.18,3120.28 4224.71,3120.28 4243.2,3101.8 4355.85,3101.8 J1.3
USB_D_N: D1.6 U2.32 | length 251.6
  Top Layer w11.19: U2.32 3974.94,3086.06 3975,3086 3977,3086 4005.4,3057.6 D1.6
USB_D_P: D1.4 R2.2 U2.33 | length 253
  Top Layer w11.19: U2.33 3976.75,3105.75 4006,3135 R2.2 4046.3,3133.7 4101.46,3133.7 D1.4
VBUS: C1.2 D1.5 FB1.1 J1.1 | length 373.9
  Top Layer w15.75: v1(4039.37,3094.49) 4039.63,3094.74 4102.5,3094.74 D1.5
  Bottom Layer w19.68: v1(4039.37,3094.49) 4039.37,3051.18 4082.68,3007.87 4238.63,3007.87 4250.01,3019.26 4250.01,3030.28 4263.78,3044.05 v1(4263.78,3047.24)
pads on no net: J1.4 J1.6 J1.7 J1.8 J1.9 J1.10 J1.11 J2.1 J2.8 J2.SH SW1.MH U2.2 U2.10 U2.11 U2.12 U2.18 U2.19 U2.21 U2.22 U2.25 U2.27 U2.28 U2.29 U2.30 U2.31 U2.38 U2.40 U2.41 U2.46 U3.2 U3.3 U3.4 U3.5 U3.6 U3.7 U3.14 U3.15 U3.16 U3.17 U3.19 U3.21 U3.22

## Polygon pours and split planes (outlines as drawn)
3V3 on Top Layer "3V3" (solid, pour order 11): 3545,2875 3555,2865 3555,2835 3540,2820 3465,2820 3455,2830 3455,2870 3460,2870 3465,2875
3V3 on Top Layer "+3V3" (solid, pour order 4): 4232.28,2613.28 4291.17,2672.17 4334.5,2672.17 4351.17,2672.17 4367,2688 4366.14,2688.86 4366.14,2732.28 4200.79,2732.28 4188.98,2744.09 4188.98,2807.09 4185.04,2811.02 4137.8,2811.02 4133.86,2807.09 4133.86,2759.84 4078.74,2704.72 4078.74,2503.94 4232.28,2503.94
GND on Top Layer "GND" (solid, pour order 9): 4302,2900 4302,2853 4323,2832 4364,2832 4372,2824 4372,2753 4370,2753 4355,2738 4307,2738 4307,2741 4287,2761 4229,2761 4222,2761 4218,2765 4218,2819 4217,2820 4129,2820 4119,2830 4119,2900
VBUS on Top Layer "VBUS" (solid, pour order 0): 4389.76,3066.93 4240.16,3066.93 4240.16,2909.45 4311.02,2909.45 4311.02,2976.38 4311.02,3043.31 4389.76,3043.31
+5V on Top Layer "5V" (solid, pour order 1): 4220.47,3027.56 4212.6,3019.68 4188.98,3019.68 4188.98,2992.13 4169.29,2972.44 4133.86,2972.44 4031.5,2972.44 4031.5,2834.65 4031.5,2755.91 4035.43,2751.97 4102.36,2751.97 4110.56,2771.65 4110.56,2917.32 4129.92,2917.32 4236.22,2917.32 4236.22,3019.68 4212.6,3019.68
GND on Layer 2 "GND" (solid, pour order 14): 4475.86,2090 4570,2184.14 4570,3610 4500,3710 3000,3710 2935.99,3645.99 2935.99,2144.01 2990,2090
GND on Layer 3 "GND" (solid, pour order 15): 4474.86,2090 4569,2184.14 4569,3610 4499,3710 2999,3710 2935,3645.99 2935,2144 2989,2090

## Silkscreen, mask and mechanical layers (free items; w line width, h text height)
Top Assembly:
  the board outline again, w10

## Text inside footprints (layer, text, board x,y; h text height)
D2: Mechanical 13 "+" at 4339.24,2649.94 h19.68
D3: Mechanical 13 "+" at 3960.02,3019.14 h19.68 r270